# EAGLE board OwlOrbOfProtection (EAGLE 9.6.0)
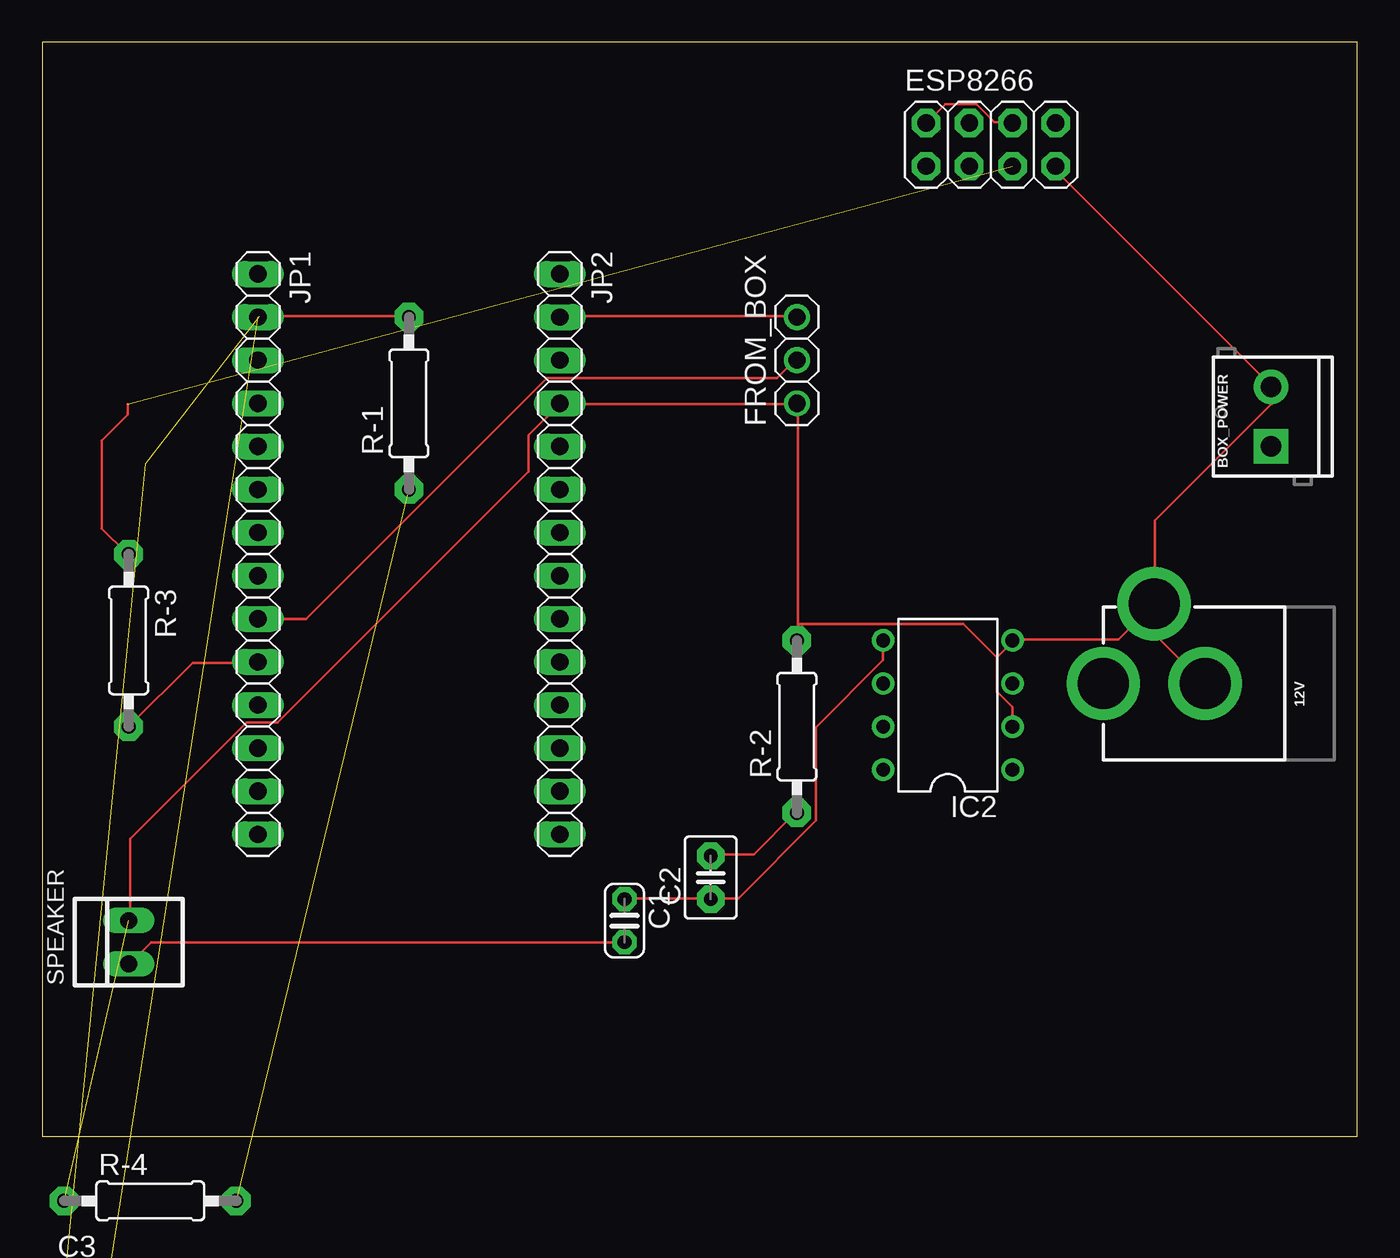
[diagram p0: board, top side]
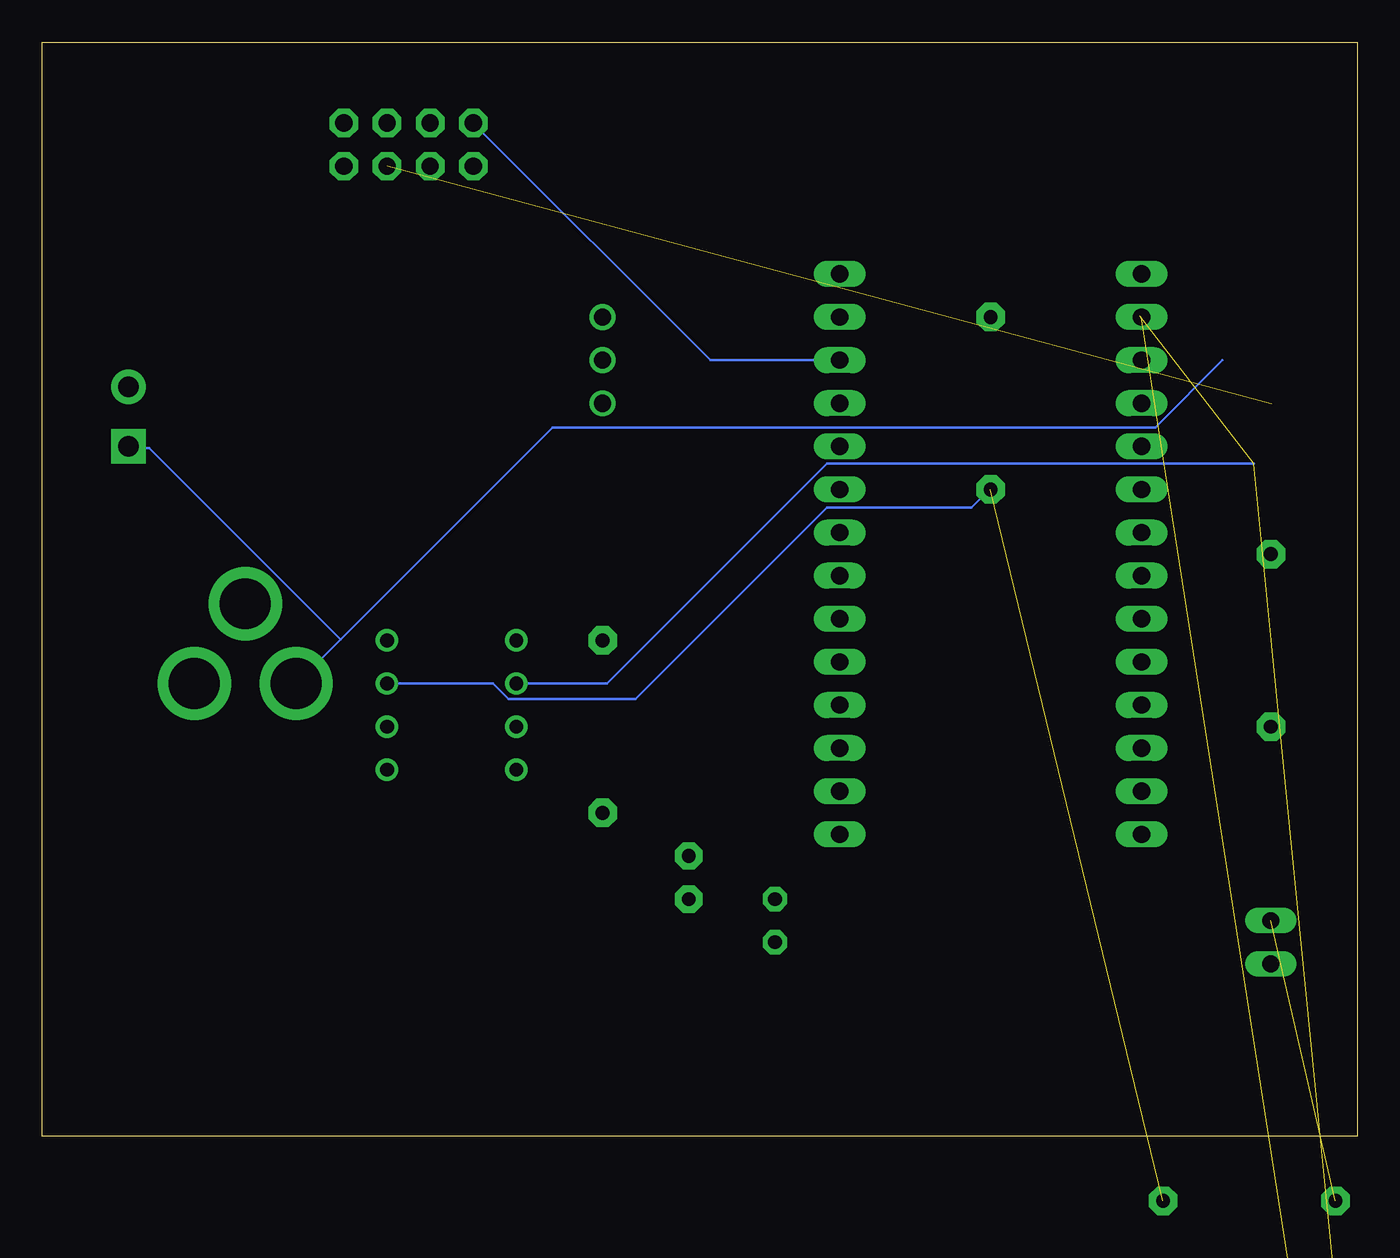
[diagram p1: board, bottom side, seen from below]

Size 77.45 x 64.44 mm. Coordinates in mm from the lower left corner, seen from the top.
Outline: 0,0 77.45,0 77.45,64.44 0,64.44 0,0
Copper layers (1*16): Top 0.035mm / dielectric 1.5mm / Bottom 0.035mm
Design rules "default": minimum track width 6mil, minimum drill 0.35mm, track to track 6mil, track to pad 6mil, pad to pad 6mil, via to via 6mil, smd to smd 6mil, copper to edge 40mil, drill to drill 6mil, minimum pad ring 10mil, minimum via ring 8mil, stop-mask expansion 4mil, vias tented up to drill 0mil, thermal gap 10mil

## Footprints (pad centres in the part's own frame; a part is rotated, then mirrored left to right if it is on the bottom)
POWER_JACK_PTH = drill 2.997 pad 4.318: GND 0,7.7; GNDBREAK 4.7,10.7; PWR 0,13.7
SCREWTERMINAL-3.5MM-2 = drill 1.2 pad 2.032 square: 1 0,0 | drill 1.2 pad 2.032: 2 3.5,0
C025-024X044 = drill 0.813 pad 1.422 octagon: 1 -1.27,0; 2 1.27,0
C2.5-3 = drill 0.813 pad 1.6 octagon: 1 -1.27,0; 2 1.27,0
2X04 = drill 1.016 pad 1.676 octagon: 1 -3.81,-1.27; 2 -3.81,1.27; 3 -1.27,-1.27; 4 -1.27,1.27; 5 1.27,-1.27; 6 1.27,1.27; 7 3.81,-1.27; 8 3.81,1.27
1X03 = drill 1.016: 1 -2.54,0; 2 0,0; 3 2.54,0
DIL08 = drill 0.813 pad 1.27: 1 -3.81,-3.81; 2 -1.27,-3.81; 3 1.27,-3.81; 4 3.81,-3.81; 5 3.81,3.81; 6 1.27,3.81; 7 -1.27,3.81; 8 -3.81,3.81
1X14 = drill 1.016 long: 1 -16.51,0; 2 -13.97,0; 3 -11.43,0; 4 -8.89,0; 5 -6.35,0; 6 -3.81,0; 7 -1.27,0; 8 1.27,0; 9 3.81,0; 10 6.35,0; 11 8.89,0; 12 11.43,0; 13 13.97,0; 14 16.51,0
0207/10 = drill 0.813 pad 1.676 octagon: 1 -5.08,0; 2 5.08,0
22-23-2021 = drill 1 long: 1 -1.27,0; 2 1.27,0

## Placement (x,y rotation side)
12V  POWER_JACK  [POWER_JACK_PTH]  76.2,26.67 90 top
BOX_POWER  [SCREWTERMINAL-3.5MM-2]  72.39,40.64 90 top
C1  247uF  [C025-024X044]  34.29,12.7 270 top
C2  0.1uF  [C2.5-3]  39.37,15.24 90 top
C3  10uF  [C2.5-3]  2.54,-8.89 0 top  (outside the outline)
ESP8266  [2X04]  55.88,58.42 0 top
FROM_BOX  [1X03]  44.45,45.72 90 top
IC2  LM386N-1  [DIL08]  53.34,25.4 90 top
JP1  [1X14]  12.7,34.29 270 top
JP2  [1X14]  30.48,34.29 270 top
R-1  4.7K  [0207/10]  21.59,43.18 90 top
R-2  10 ohm  [0207/10]  44.45,24.13 90 top
R-3  220 ohm  [0207/10]  5.08,29.21 270 top
R-4  4.7K  [0207/10]  6.35,-3.81 0 top  (outside the outline)
SPEAKER  22-23-2021  [22-23-2021]  5.08,11.43 90 top

## Library data of the parts
12V = SparkFun-Connectors; PROD_ID: CONN-08197
BOX_POWER = SparkFun-Connectors; PROD_ID: CONN-08399
C1 ESP8266 FROM_BOX JP1 JP2 R-1-R-4 = adafruit
C2 C3 = capacitor-wima
IC2 = linear
SPEAKER = con-molex; MF: MOLEX; MPN: 22-23-2021; OC_FARNELL: 1462926; OC_NEWARK: 25C3832

## Nets
3.3V: ESP8266.2 ESP8266.6 JP2.3
5V: FROM_BOX.3 JP2.2
12V: 12V.PWR BOX_POWER.1
GND: 12V.GND 12V.GNDBREAK BOX_POWER.2 ESP8266.7 FROM_BOX.1 IC2.2 IC2.4 JP2.4 R-2.2 R-4.1 SPEAKER.2
N$1: FROM_BOX.2 JP1.9
N$2: C2.2 R-2.1
N$3: C1.1 C2.1 IC2.5
N$4: ESP8266.5 R-3.1
N$5: IC2.3 R-1.1 R-4.2
N$6: C3.1 IC2.6 R-1.2
N$7: C1.2 SPEAKER.1
N$8: C3.2 JP1.2
N$10: JP1.10 R-3.2

## Tracks (layer width: path | path; a pad name or v marks a point on that pad's centre or on a via)
3.3V
  Top 0.152: ESP8266.2 53.19,60.81 55.02,60.81 56.08,59.74 57.15,59.74 ESP8266.6
  Bottom 0.152: JP2.3 38.1,45.72 ESP8266.2
5V
  Top 0.152: JP2.2 30.48,48.31 44.35,48.31 FROM_BOX.3
12V
  Bottom 0.152: 7.92,45.72 11.89,41.76 47.4,41.76 59.89,29.26 | 59.89,29.26 62.48,26.67 12V.PWR | 59.89,29.26 71.17,40.54 72.39,40.54 BOX_POWER.1
GND  (1 unrouted)
  Top 0.152: 30.48,43.13 28.65,41.3 28.65,39.17 13.87,24.38 12.04,24.38 5.18,17.53 5.18,12.8 SPEAKER.2 | ESP8266.7 59.74,57.15 59.74,56.84 72.39,44.2 BOX_POWER.2 72.39,43.13 65.53,36.27 65.53,31.39 12V.GNDBREAK | 44.5,30.18 44.5,29.26 R-2.2 | 44.5,30.18 44.5,43.13 FROM_BOX.1 44.35,43.13 30.48,43.13 | IC2.2 57.15,25.3 56.24,26.21 56.24,28.19 | 56.24,28.19 57.15,29.11 IC2.4 57.15,29.26 63.4,29.26 64.62,30.48 | 64.62,30.48 65.38,31.24 12V.GNDBREAK | 44.5,30.18 54.25,30.18 56.24,28.19 | 64.62,30.48 68.43,26.67 12V.GND | 64.62,30.48 12V.GNDBREAK | 30.48,43.13 JP2.4
N$1
  Top 0.152: JP1.9 15.54,30.48 29.72,44.65 43.28,44.65 44.35,45.72 FROM_BOX.2
N$2
  Top 0.152: C2.2 39.47,16.61 41.91,16.61 44.35,19.05 R-2.1
N$3
  Top 0.152: IC2.5 49.53,28.04 45.57,24.08 45.57,18.59 41,14.02 39.47,14.02 C2.1 39.32,14.02 34.29,14.02 C1.1
N$4  (1 unrouted)
  Top 0.152: 5.03,43.13 5.03,42.52 3.5,41 3.5,35.81 5.03,34.29 R-3.1
N$5  (2 unrouted)
  Bottom 0.152: IC2.3 50.9,26.67 49.99,25.76 42.52,25.76 31.24,37.03 22.71,37.03 21.64,38.1
N$6  (2 unrouted)
  Top 0.152: 12.8,48.31 21.49,48.31 R-1.2
  Bottom 0.152: IC2.6 44.2,26.67 31.24,39.62 6.1,39.62
N$7
  Top 0.152: C1.2 6.4,11.43 5.18,10.21 SPEAKER.1
N$8  (1 unrouted)
N$10
  Top 0.152: R-3.2 8.84,27.89 12.65,27.89 JP1.10